# EAGLE board motorFeedback (EAGLE 5.11)
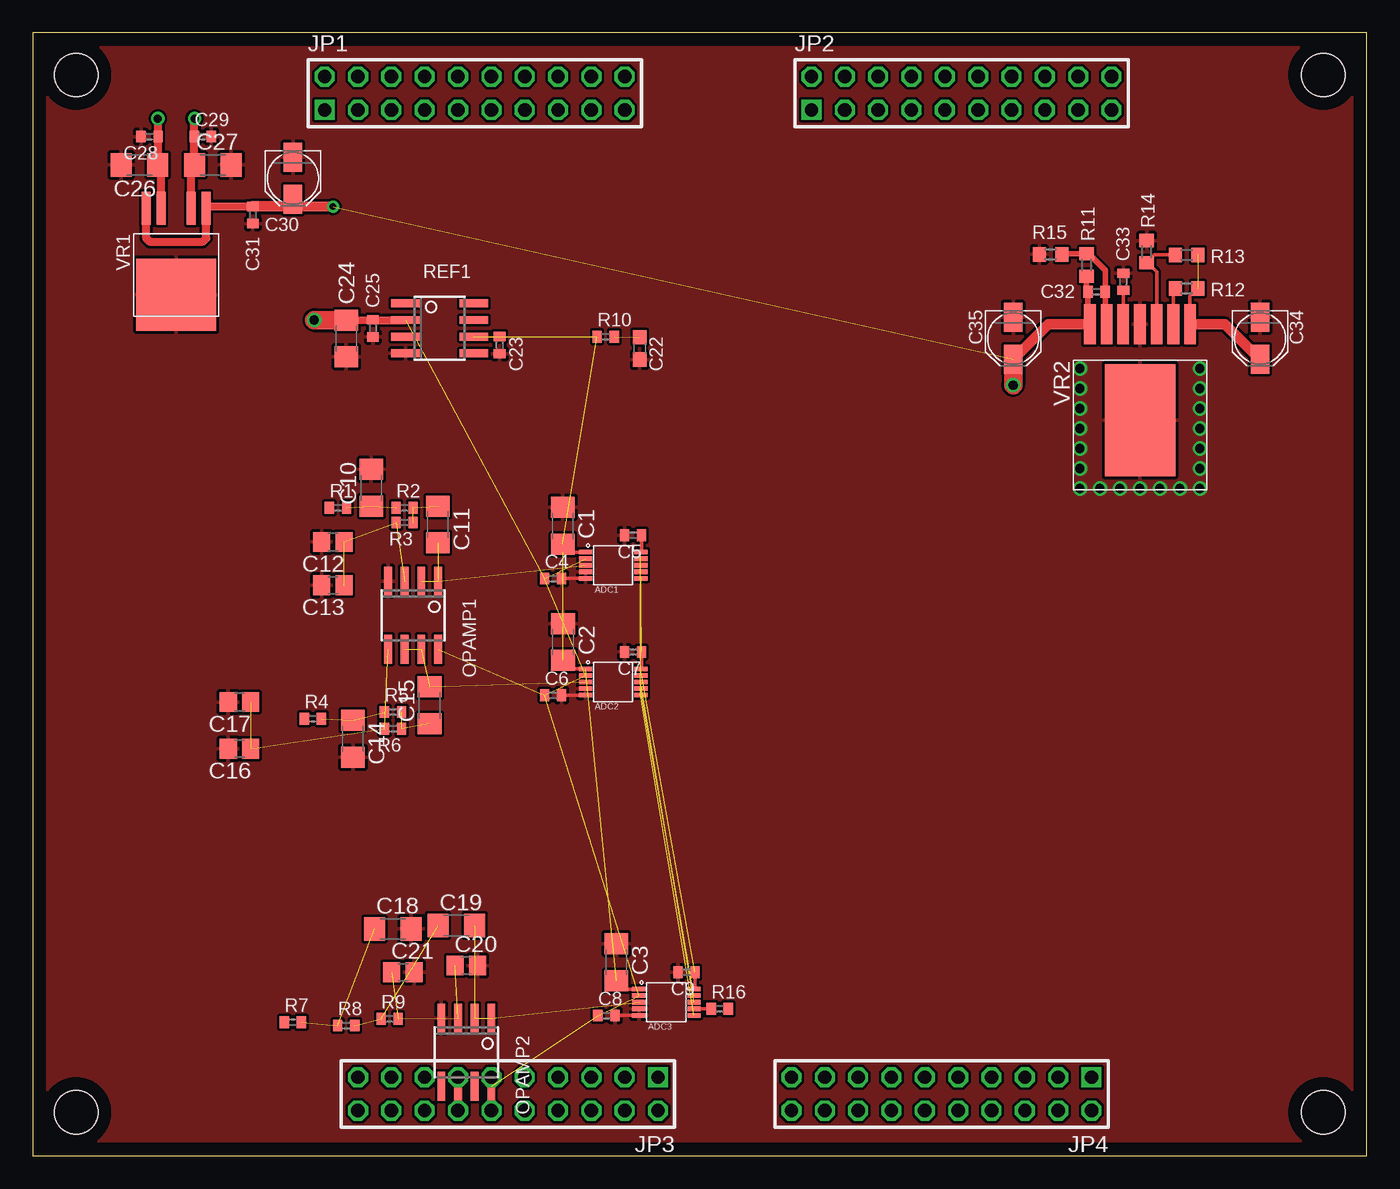
[diagram p0: board, top side]
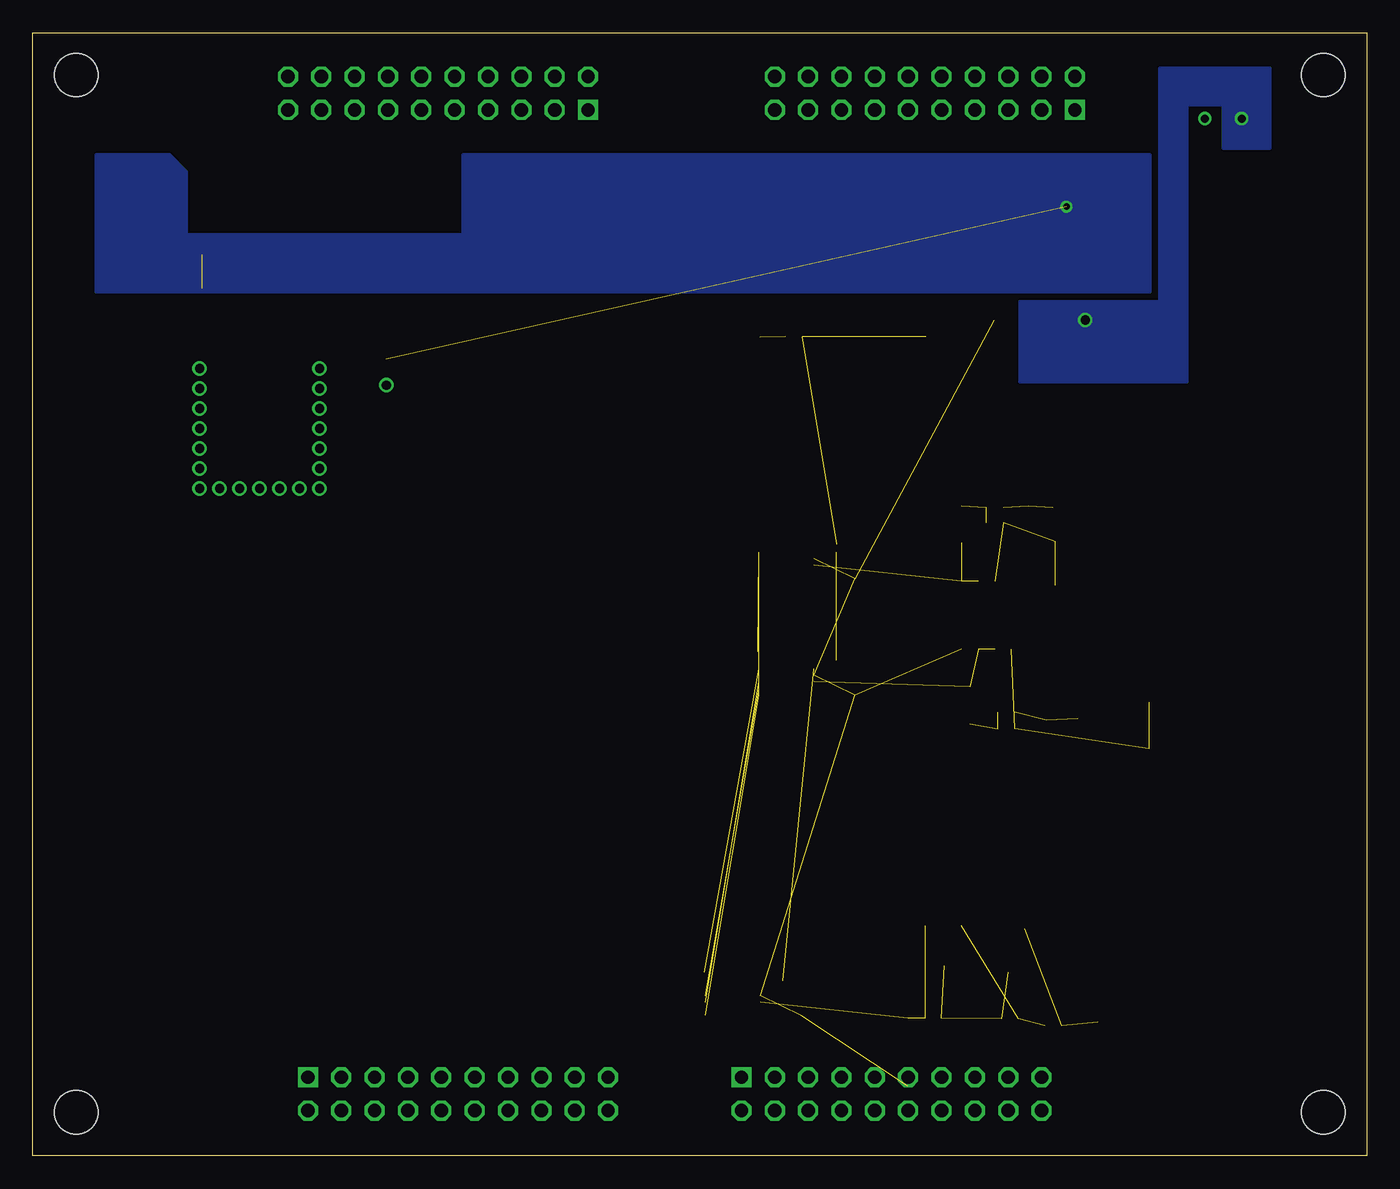
[diagram p1: board, bottom side, seen from below]

Size 101.6 x 85.5 mm. Coordinates in mm from the lower left corner, seen from the top.
Outline: 0,0 101.6,0 101.6,85.5 0,85.5 0,0
Copper layers (1*16): Top 0.035mm / dielectric 1.5mm / Bottom 0.035mm
Design rules "default": minimum track width 10mil, minimum drill 24mil, track to track 8mil, track to pad 8mil, pad to pad 8mil, via to via 8mil, smd to smd 8mil, copper to edge 40mil, drill to drill 8mil, minimum pad ring 10mil, minimum via ring 8mil, stop-mask expansion 4mil, vias tented up to drill 0mil, thermal gap 10mil
Holes 3.3 mm at 3.3,3.3 98.3,82.3 98.3,3.3 3.3,82.3

## Footprints (pad centres in the part's own frame; a part is rotated, then mirrored left to right if it is on the bottom)
MSOP-10 = smd 1.016 x 0.356: 1 -2.1,1; 2 -2.1,0.5; 3 -2.1,0; 4 -2.1,-0.5; 5 -2.1,-1; 6 2.1,-1; 7 2.1,-0.5; 8 2.1,0; 9 2.1,0.5; 10 2.1,1
C1206 = smd 1.6 x 1.8: 1 -1.4,0; 2 1.4,0
C0402 = smd 0.7 x 0.9: 1 -0.65,0; 2 0.65,0
C0805 = smd 1.3 x 1.5: 1 -0.85,0; 2 0.85,0
C0603 = smd 1.1 x 1: 1 -0.85,0; 2 0.85,0
PANASONIC_B = smd 2.2 x 1.4: + 1.6,0; - -1.6,0
2X10 = drill 1.016 square: 1 -11.43,-1.27 | drill 1.016 octagon: 2 -11.43,1.27; 3 -8.89,-1.27; 4 -8.89,1.27; 5 -6.35,-1.27; 6 -6.35,1.27; 7 -3.81,-1.27; 8 -3.81,1.27; 9 -1.27,-1.27; 10 -1.27,1.27; 11 1.27,-1.27; 12 1.27,1.27; 13 3.81,-1.27; 14 3.81,1.27; 15 6.35,-1.27; 16 6.35,1.27; 17 8.89,-1.27; 18 8.89,1.27; 19 11.43,-1.27; 20 11.43,1.27
SOIC8 = smd 0.6 x 2.2: 1 -1.905,-2.6; 2 -0.635,-2.6; 3 0.635,-2.6; 4 1.905,-2.6; 5 1.905,2.6; 6 0.635,2.6; 7 -0.635,2.6; 8 -1.905,2.6
R0402 = smd 0.7 x 0.9: 1 -0.65,0; 2 0.65,0
R0603 = smd 1 x 1.1: 1 -0.85,0; 2 0.85,0
PG-TO252-5-11 = smd 0.711 x 2.54: 1 -2.286,-5.08; 2 -1.143,-5.08; 4 1.143,-5.08; 5 2.286,-5.08 | smd 6.096 x 5.461: 3 0,1.499
PFM-7 = smd 0.889 x 3.048: 1 -3.81,-7.671; 2 -2.54,-7.671; 3 -1.27,-7.671; 4 0,-7.671; 5 1.27,-7.671; 6 2.54,-7.671; 7 3.81,-7.671 | smd 5.359 x 8.534: PAD 0,-0.356

## Placement (x,y rotation side)
ADC1  AD7685RM-10  [MSOP-10]  44.2,44.96 0 top
ADC2  AD7685RM-10  [MSOP-10]  44.2,36.07 0 top
ADC3  AD7685RM-10  [MSOP-10]  48.26,11.68 0 top
C1  22u  [C1206]  40.36,47.96 270 top
C2  22u  [C1206]  40.39,39.12 270 top
C3  22u  [C1206]  44.45,14.73 270 top
C4  0.1u  [C0402]  39.62,43.94 0 top
C5  0.1u  [C0402]  45.72,47.24 180 top
C6  0.1u  [C0402]  39.62,35.05 0 top
C7  0.1u  [C0402]  45.72,38.35 180 top
C8  0.1u  [C0402]  43.69,10.67 0 top
C9  0.1u  [C0402]  49.78,13.97 180 top
C10  10u  [C1206]  25.78,50.85 90 top
C11  10u  [C1206]  30.86,48.06 270 top
C12  1u  [C0805]  22.86,46.74 180 top
C13  0.47u  [C0805]  22.86,43.43 180 top
C14  10u  [C1206]  24.38,31.75 270 top
C15  10u  [C1206]  30.23,34.29 90 top
C16  1u  [C0805]  15.75,30.99 180 top
C17  0.47u  [C0805]  15.75,34.54 180 top
C18  10u  [C1206]  27.43,17.27 0 top
C19  10u  [C1206]  32.26,17.53 0 top
C20  1u  [C0805]  33.02,14.48 0 top
C21  0.47u  [C0805]  28.19,13.97 0 top
C22  0.33u  [C0603]  46.23,61.47 270 top
C23  0.1u  [C0402]  35.56,61.72 270 top
C24  10u  [C1206]  23.88,62.23 270 top
C25  0.1u  [C0402]  25.91,62.99 270 top
C26  22u  [C1206]  8.13,75.44 180 top
C27  22u  [C1206]  13.72,75.44 0 top
C28  0.1u  [C0402]  8.89,77.6 180 top
C29  0.1u  [C0402]  12.95,77.6 0 top
C30  [PANASONIC_B]  19.81,74.42 270 top
C31  0.1u  [C0402]  16.76,71.63 270 top
C32  0.022u  [C0402]  81.03,65.79 180 top
C33  4700p  [C0402]  83.06,66.55 270 top
C34  22u  [PANASONIC_B]  93.47,62.23 270 top
C35  47u  [PANASONIC_B]  74.68,62.23 270 top
JP1  [2X10]  33.66,80.9 0 top
JP2  [2X10]  70.74,80.9 0 top
JP3  [2X10]  36.2,4.7 180 top
JP4  [2X10]  69.22,4.7 180 top
OPAMP1  AD8616R-8  [SOIC8]  28.96,41.15 180 top
OPAMP2  AD8616R-8  [SOIC8]  33.02,7.87 180 top
R1  680  [R0402]  23.24,49.33 0 top
R2  2.2k  [R0402]  28.32,49.33 0 top
R3  1.2k  [R0402]  28.32,48.21 180 top
R4  680  [R0402]  21.34,33.27 0 top
R5  2.2k  [R0402]  27.43,33.78 0 top
R6  1.2k  [R0402]  27.43,32.51 180 top
R7  680  [R0402]  19.81,10.16 0 top
R8  2.2k  [R0402]  23.88,9.91 0 top
R9  1.2k  [R0402]  27.18,10.41 0 top
R10  10k  [R0402]  43.64,62.36 0 top
R11  34k  [R0603]  80.26,67.82 270 top
R12  249k  [R0603]  87.88,66.04 180 top
R13  [R0603]  87.88,68.58 180 top
R14  [R0603]  84.84,68.83 270 top
R15  2.43k  [R0603]  77.52,68.63 0 top
R16  33  [R0402]  52.32,11.18 0 top
REF1  ADR433RM-8  [SOIC8]  30.99,62.99 270 top
VR1  TLE4476D  [PG-TO252-5-11]  10.92,67.06 180 top
VR2  LMZ14202HTZ  [PFM-7]  84.33,55.63 180 top

## Library data of the parts
ADC1-ADC3 C1-C35 OPAMP1 OPAMP2 R1-R16 REF1 VR1 VR2 = motorFeedback
JP1-JP4 = pinhead

## Nets
+3.000VREF: ADC1.1 ADC2.1 ADC3.1 C1.2 C2.2 C3.2 C23.1 R10.1 REF1.6
+3.3V: C27.1 C29.1 VR1.2
+5V: ADC1.2 ADC2.2 ADC3.2 C4.1 C6.1 C8.1 C24.1 C25.1 C26.1 C28.1 OPAMP1.8 OPAMP2.8 REF1.2 VR1.4
+9-36V: C34.+ R12.1 R13.1 VR2.1
+12V: C30.+ C31.1 C32.2 C35.+ R11.2 VR1.1 VR1.5 VR2.7
ADC1_IN+: ADC1.3 C11.2 OPAMP1.1 OPAMP1.2
ADC2_IN+: ADC2.3 C15.2 OPAMP1.6 OPAMP1.7
ADC3_IN+: ADC3.3 C19.2 OPAMP2.1 OPAMP2.2
CNV: ADC1.6 ADC1.9 ADC2.6 ADC3.6
GND: ADC1.4 ADC1.5 ADC2.4 ADC2.5 ADC3.4 ADC3.5 C1.1 C2.1 C3.1 C4.2 C5.2 C6.2 C7.2 C8.2 C9.2 C10.2 C12.2 C13.2 C14.2 C16.2 C17.2 C18.2 C20.2 C21.2 C22.2 C23.2 C24.2 C25.2 C26.2 C27.2 C28.2 C29.2 C30.- C31.2 C33.1 C34.- C35.- OPAMP1.4 OPAMP2.4 R14.1 R15.1 REF1.4 VR1.3 VR2.4 VR2.PAD
N$1: C12.1 C13.1 OPAMP1.3 R3.2
N$2: C16.1 C17.1 OPAMP1.5 R6.2
N$4: C11.1 R2.2 R3.1
N$6: R1.1
N$8: C15.1 R5.2 R6.1
N$9: R4.1
N$11: C14.1 R4.2 R5.1
N$12: C20.1 C21.1 OPAMP2.3 R9.2
N$13: C19.1 R8.2 R9.1
N$14: R7.1
N$16: C18.1 R7.2 R8.1
N$17: R12.2 VR2.2
N$18: R13.2 R14.2 VR2.3
N$19: C33.2 VR2.5
N$20: C32.1 R11.1 R15.2 VR2.6
N$21: C22.1 R10.2
N$22: C10.1 R1.2 R2.1
SCK: ADC1.8 ADC2.8 ADC3.8
SDO: R16.2
SDO1: ADC1.7 ADC2.9
SDO2: ADC2.7 ADC3.9
SDO3: ADC3.7 R16.1
VIO: ADC1.10 ADC2.10 ADC3.10 C5.1 C7.1 C9.1

## Tracks (layer width: path | path; a pad name or v marks a point on that pad's centre or on a via)
+3.000VREF  (5 unrouted)
  Top 0.254: ADC2.1 40.39,37.07 C2.2 | ADC3.1 44.45,12.68 C3.2 | ADC1.1 40.4,45.96 40.39,45.97 40.39,46.78 C1.2
+3.3V  (via drill 0.6)
  Top 0.61: VR1.2 12.06,75.44 | 12.06,75.44 C27.1 | 12.06,75.44 arc90 12.3,75.68 C29.1 12.3,78.95 v12.32,78.97
+5V  (via drill 0.6, 0.7)  (8 unrouted)
  Top 0.61: VR1.4 9.78,75.44 | 9.78,75.44 C26.1 | 9.78,75.44 arc-90 9.54,75.68 C28.1 9.54,78.95 v9.53,78.97 | C24.1 C25.1 25.92,63.63 REF1.2
  Top 1.422: C24.1 v21.44,63.63
  pour Bottom: 7.37,76.71 10.92,76.71 10.92,80.01 13.72,80.01 13.72,58.93 26.42,58.93 26.42,65.02 15.75,65.02 15.75,82.8 7.37,82.8
+9-36V  (1 unrouted)
  Top 0.254: R12.1 88.14,65.44 VR2.1
  Top 0.813: C34.+ 90.81,63.3 VR2.1
+12V  (via drill 0.5, 0.7)  (1 unrouted)
  Top 0.254: VR2.7 80.52,64.26
  Top 0.406: 80.52,64.26 80.38,64.26 C32.2 80.26,65.9 R11.2
  Top 0.61: C31.1 13.35,72.28 VR1.1 13.21,69.85 12.95,69.6 8.89,69.6 8.64,69.85 VR1.5 | C30.+ 19.81,72.21 19.81,72.27
  Top 0.813: C35.+ 77.34,63.3 VR2.7 | 18.27,72.28 18.35,72.28 | C31.1 18.27,72.28 | v22.86,72.26 19.81,72.27 18.27,72.28
  Top 1.422: C35.+ v74.68,58.67
  pour Bottom: 92.71,76.2 91.19,76.2 89.92,74.93 89.92,70.1 75.69,70.1 72.9,70.1 68.83,70.1 68.83,76.2 21.34,76.2 16.51,76.2 16.51,65.79 96.77,65.79 96.77,76.2
ADC1_IN+  (3 unrouted)
ADC2_IN+  (3 unrouted)
ADC3_IN+  (3 unrouted)
CNV  (3 unrouted)
GND  (via drill 0.7)
  Top 0.254: ADC3.5 44.34,10.68 C8.2 | ADC1.5 40.27,43.96 C4.2 | ADC2.5 40.27,35.07 C6.2
  other vias: 88.9,50.8 88.9,52.32 87.38,50.8 85.85,50.8 84.33,50.8 82.8,50.8 81.28,50.8 79.76,50.8 79.76,52.32 79.76,53.85 79.76,55.37 79.76,56.9 79.76,58.42 79.76,59.94 88.9,53.85 88.9,55.37 88.9,56.9 88.9,58.42 88.9,59.94
  pour Top: 0.25,0.25 101.35,0.25 101.35,85.24 0.25,85.24
N$1  (3 unrouted)
N$2  (3 unrouted)
N$4  (2 unrouted)
N$8  (2 unrouted)
N$11  (2 unrouted)
N$12  (3 unrouted)
N$13  (2 unrouted)
N$16  (2 unrouted)
N$17
  Top 0.254: R12.2 86.87,65.87 VR2.2
N$18
  Top 0.254: VR2.3 85.6,67.31 84.92,67.98 R14.2 85.43,68.58 R13.2
N$19
  Top 0.254: C33.2 VR2.5
N$20
  Top 0.406: VR2.6 81.68,63.3 C32.1 81.68,67.42 80.43,68.67 R11.1 78.41,68.67 R15.2
N$21  (1 unrouted)
N$22  (2 unrouted)
SCK  (2 unrouted)
SDO1  (1 unrouted)
SDO2  (1 unrouted)
SDO3
  Top 0.254: ADC3.7 R16.1
VIO  (2 unrouted)
  Top 0.254: C9.1 50.43,12.76 ADC3.10 | C7.1 46.37,37.14 ADC2.10 | C5.1 46.37,46.03 ADC1.10